# Altium PCB PCB1.PcbDoc (part 1 of 4)
Units mil, origin at the board's own origin, x right, y up, seen from the top; angles counter-clockwise.
Board outline 5048.23 x 6841.54 mil, 6 copper layers (Top Layer, Layer 1, Layer 2, Layer 3, Layer 4, Bottom Layer), stack 32.112 mil thick; 417 components, 339 nets, 2232 pads, 0 vias.
Unrouted connection lines stored in the file: 1169.
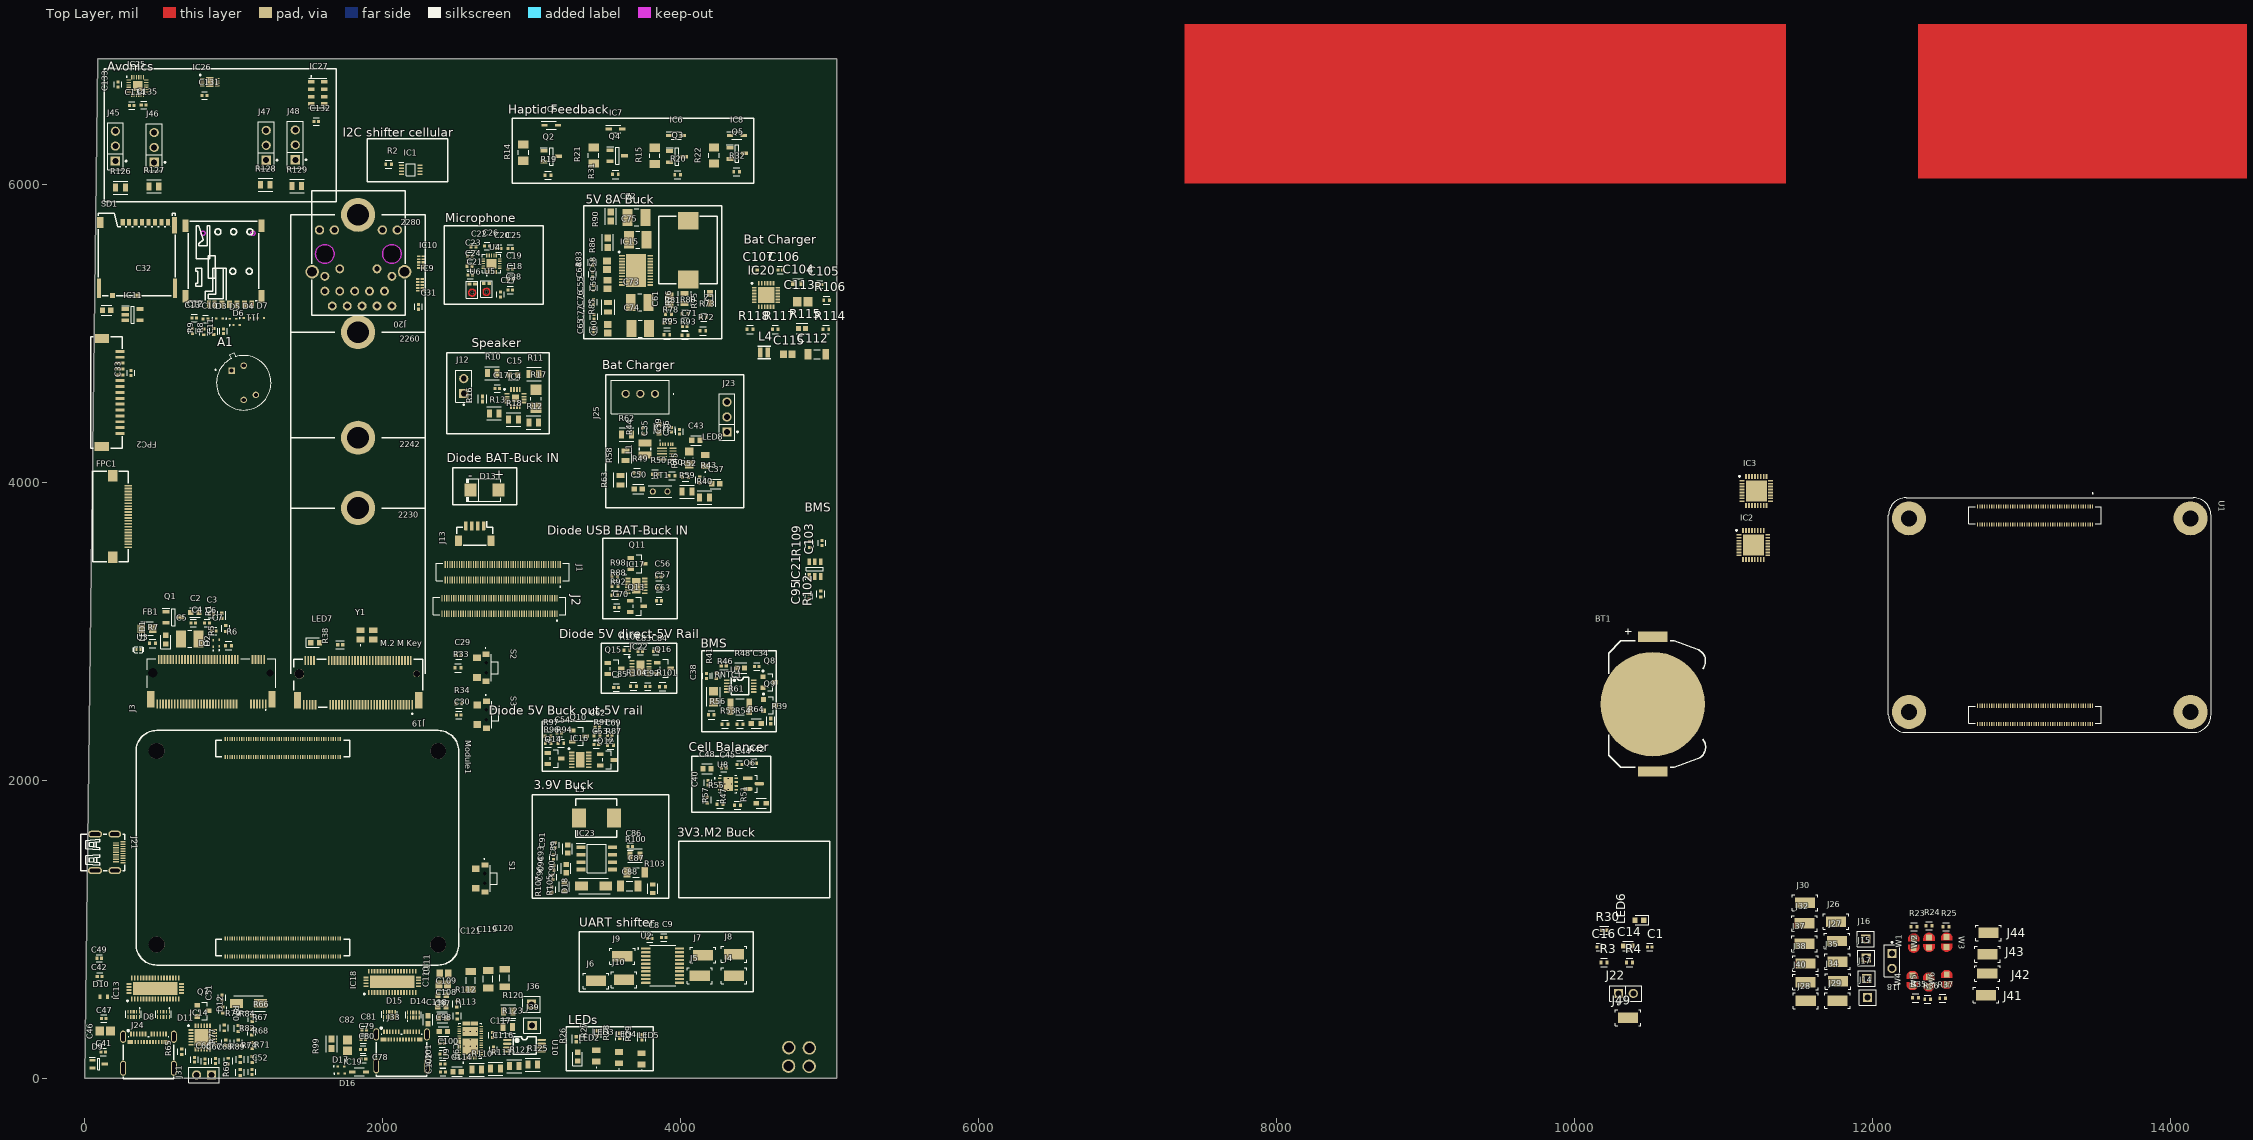
[diagram p0: Top Layer view]
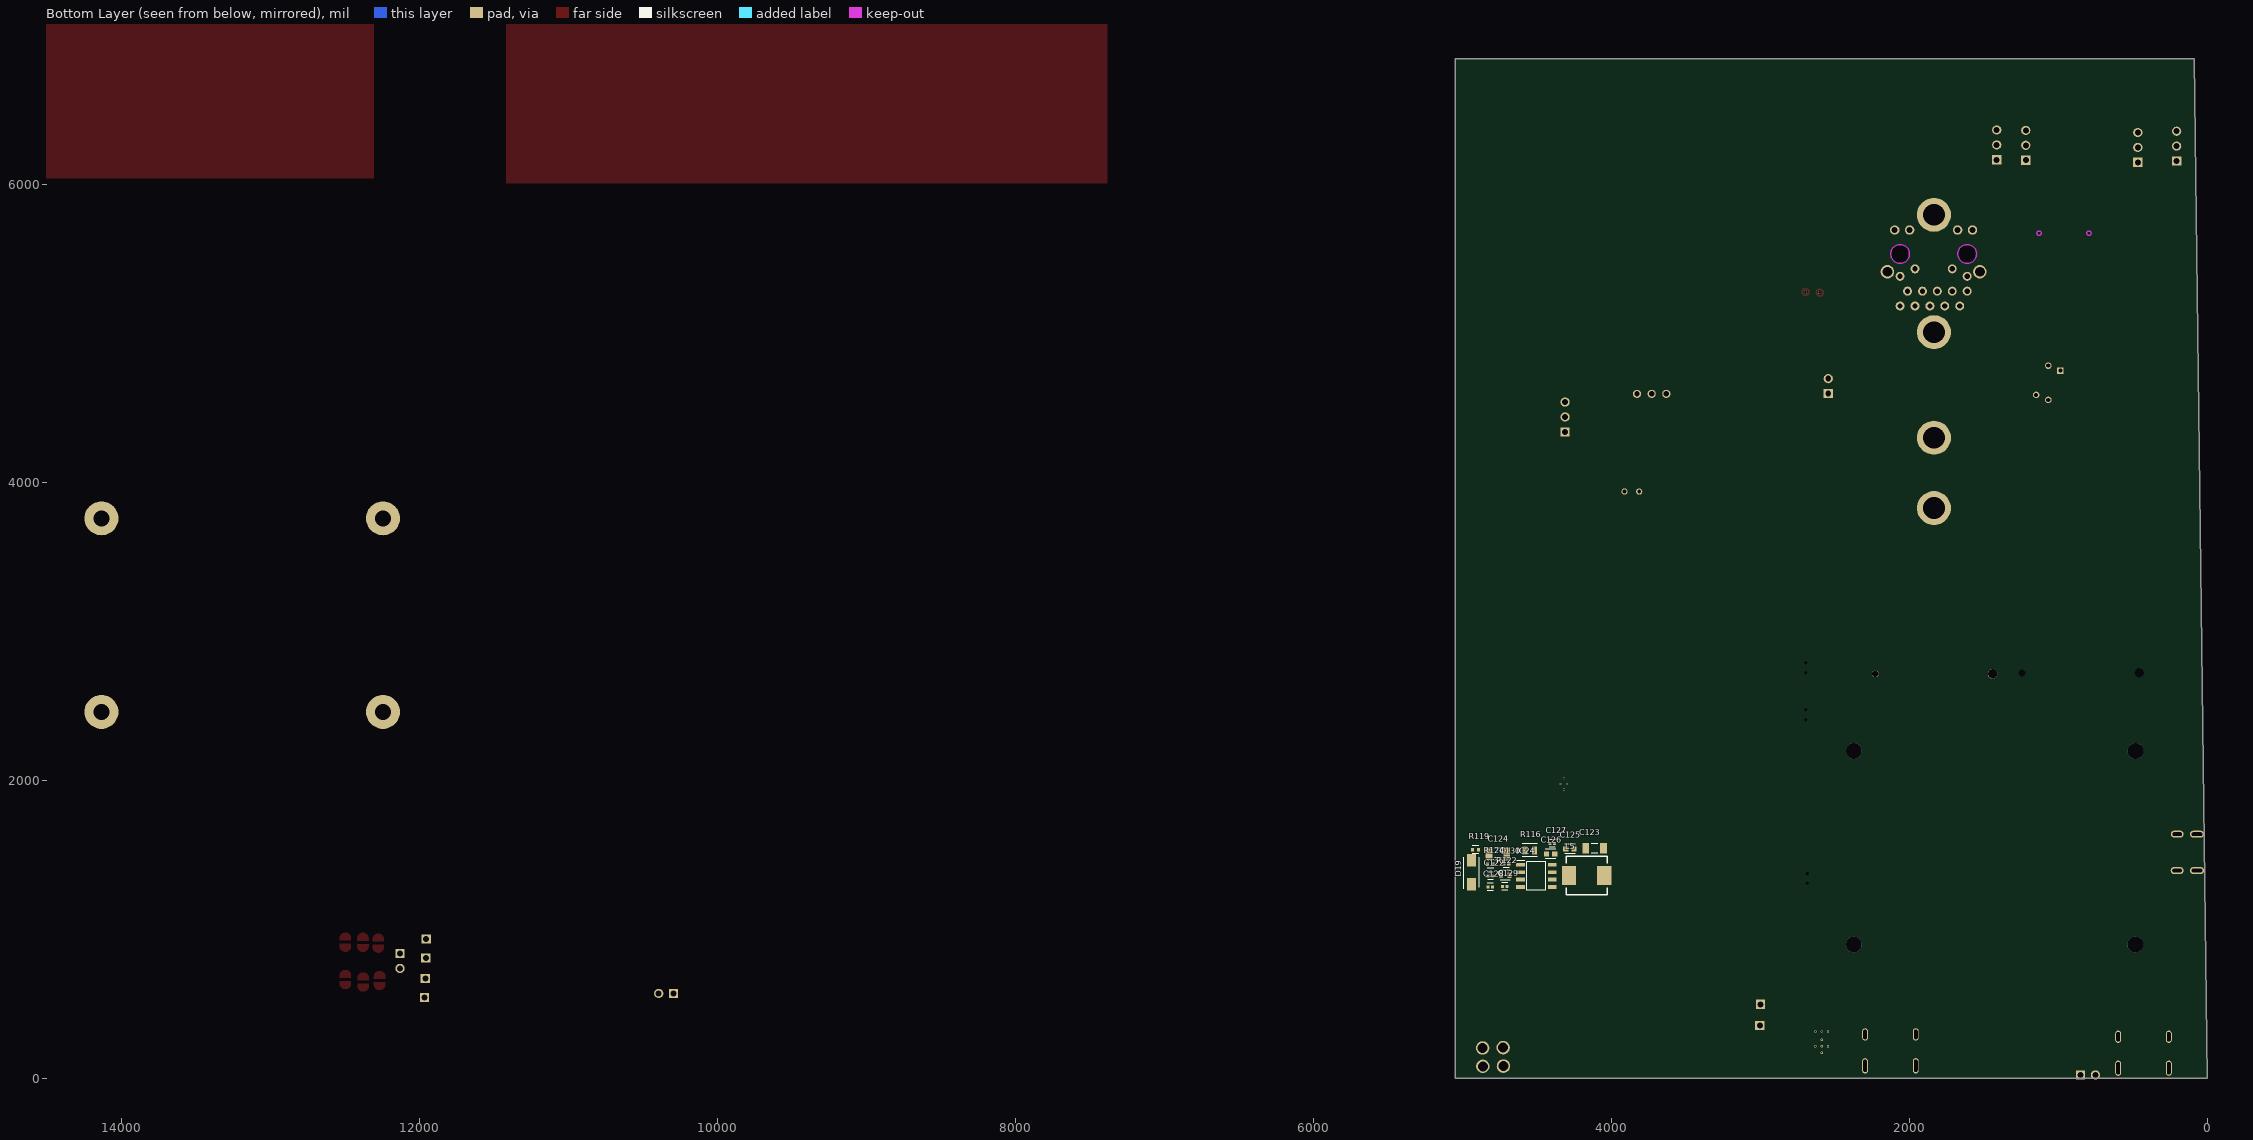
[diagram p1: Bottom Layer view, seen from below]

## Layer stack, top to bottom
Top Solder: solder mask 0.4, Solder Resist, Dk 3.5
Top Layer: signal copper 1.4
Dielectric 2: prepreg 2.8, PP-006, Dk 4.1
Layer 1: signal copper 1.378
Dielectric 3: prepreg 2.8, PP-006, Dk 4.1
Layer 2: signal copper 1.378
Dielectric 1: dielectric 12.6, FR-4, Dk 4.8
Layer 3: signal copper 1.378
Dielectric 4: prepreg 2.8, PP-006, Dk 4.1
Layer 4: signal copper 1.378
Dielectric 5: prepreg 2.8, PP-006, Dk 4.1
Bottom Layer: signal copper 1.4
Bottom Solder: solder mask 0.4, Solder Resist, Dk 3.5

## Board outline
0,0 5048.23,0 5048.23,6841.54 85.52,6841.54

## Design rules (kind name [scope] priority, off if disabled: settings)
Clearance Clearance2 [OnLayer('Power')] p1: gap=10 ignorepadtopadclearanceinfootprint=TRUE
Clearance Clearance_1 [All] p2: gap=4.5 ignorepadtopadclearanceinfootprint=TRUE
DiffPairsRouting [All] p1: maxlimit=5 minlimit=4.5 mostfreqgap=5 toplayer_prefgap=4.5 toplayer_minwidth=12.65 toplayer_maxwidth=14.97 toplayer_prefwidth=12.65 midlayer1_mingap=5 midlayer1_minwidth=15 midlayer1_maxwidth=15 midlayer1_prefwidth=15 midlayer2_mingap=5 midlayer2_minwidth=15 midlayer2_maxwidth=15 midlayer2_prefwidth=15 midlayer3_mingap=5 midlayer3_minwidth=15 midlayer3_maxwidth=15 midlayer3_prefwidth=15 midlayer4_mingap=5 midlayer4_minwidth=15 midlayer4_maxwidth=15 midlayer4_prefwidth=15 bottomlayer_prefgap=4.5 bottomlayer_minwidth=12.65 bottomlayer_maxwidth=14.97 bottomlayer_prefwidth=12.65 maxuncoupledlength=500
PolygonConnect [All] p1: connectstyle=Direct reliefconductorwidth=10 reliefentries=4 polygonreliefangle="90 Angle" airgapwidth=10
RoutingVias [All] p1: holewidth=12 width=24 viastyle="Through Hole" minholewidth=12 minwidth=18 maxholewidth=25 maxwidth=50
SolderMaskExpansion [All] p1: expansion=4 istentingtop=FALSE
SupplyNets "Schematic Supply Nets_23" [InNet('+3.9V_Filtered')] p1: voltage=0.000
SupplyNets "Schematic Supply Nets_16" [InNet('GND')] p2: voltage=0.000
SupplyNets "Schematic Supply Nets_22" [InNet('Buck_Input')] p3: voltage=0.000
SupplyNets "Schematic Supply Nets_21" [InNet('5V_Direct_PD_Out')] p4: voltage=0.000
SupplyNets "Schematic Supply Nets_20" [InNet('Buck_Out_5V')] p5: voltage=0.000
SupplyNets "Schematic Supply Nets" [InNet('VCC_USB_Bat_Sink')] p6: voltage=0.000
SupplyNets "Schematic Supply Nets_19" [InNet('USB_PD_3V3')] p7: voltage=0.000
SupplyNets "Schematic Supply Nets_18" [InNet('VCC_USB_Bat')] p8: voltage=0.000
SupplyNets "Schematic Supply Nets_10" [InNet('VCC_USB_Power')] p9: voltage=0.000
SupplyNets "Schematic Supply Nets_9" [InNet('+3V3_SD')] p10: voltage=0.000
SupplyNets "Schematic Supply Nets_8" [InNet('+3.9V')] p11: voltage=0.000
SupplyNets "Schematic Supply Nets_7" [InNet('+1.8V')] p12: voltage=0.000
SupplyNets "Schematic Supply Nets_4" [InNet('+5')] p13: voltage=0.000
SupplyNets "Schematic Supply Nets_2" [InNet('3V3_M2')] p14: voltage=0.000
SupplyNets "Schematic Supply Nets_15" [InNet('Midtap')] p15: voltage=0.000
SupplyNets "Schematic Supply Nets_13" [InNet('+3V3')] p16: voltage=0.000
SupplyNets "Schematic Supply Nets_5" [InNet('Bat+')] p17: voltage=0.000
SupplyNets "Schematic Supply Nets_3" [InNet('Bat-')] p18: voltage=0.000
Width [InNet('+3V3_RF')] p1: maxlimit=14.05 minlimit=10 preferedwidth=14.05 toplayer_minwidth=14.05 bottomlayer_minwidth=14.05 minimp=50.000000 maximp=50.000000 favimp=50.000000
Width Width_1 [InNet('NetC47_2')] p2: maxlimit=14.05 minlimit=10 preferedwidth=14.05 toplayer_minwidth=14.05 bottomlayer_minwidth=14.05 minimp=50.000000 maximp=50.000000 favimp=50.000000
Width Width2 [InNet('ANT_RF')] p3: maxlimit=50 minlimit=5 preferedwidth=15 toplayer_minwidth=14.05 toplayer_maxwidth=14.05 toplayer_prefwidth=14.05 bottomlayer_minwidth=14.05 bottomlayer_maxwidth=14.05 bottomlayer_prefwidth=14.05 minimp=50.000000 maximp=50.000000 favimp=50.000000 // NetC47_2
Width Widthall [All] p4: maxlimit=80 minlimit=4 preferedwidth=15 midlayer1_maxwidth=50 midlayer2_maxwidth=50 midlayer3_maxwidth=50 midlayer4_maxwidth=50 minimp=50.000000 maximp=50.000000 favimp=50.000000
29 further rules are at their usual default settings.

## Classes and differential pairs
component class "Flight - Avonics": C131 C132 C133 C134 C135 IC25 IC26 IC27 J41 J42 J43 J44 J45 J46 J47 J48 J49 R126 R127 R128 R129
component class Power: C34 C35 C36 C37 C38 C39 C40 C41 C42 C43 C44 C45 C46 C47 C48 C49 C50 C51 C52 C53 C54 C55 C56 C57 C58 C59 C60 C61 C62 C63 C64 C65 C66 C67 C68 C69 C70 C71 C72 C73 C74 C75 C76 C77 C78 C79 C80 C81 C82 C83 C84 C85 C86 C87 C88 C89 C90 C91 C92 C93 C94 C95 C96 C97 C98 C99 C100 C101 C102 C103 C104 C105 C106 C107 C108 C109 C110 C111 C112 C113 C114 C115 C116 C117 C118 C119 C120 C121 C122 C123 C124 C125 C126 C127 C128 C129 C130 D8 D9 D10 D11 D12 D13 D14 D15 D16 D17 D18 D19 IC12 IC13 IC14 IC15 IC16 IC17 IC18 IC19 IC20 IC21 IC22 IC23 IC24 J23 J24 J25 J26 J27 J28 J29 J30 J31 J32 J33 J34 J35 J36 J37 J38 J39 J40 L1 L2 L3 L4 L5 LED8 Q6 Q7 Q8 Q9 Q10 Q11 Q12 Q13 Q14 Q15 Q16 R39 R40 R41 R42 R43 R44 R45 R46 R47 R48 R49 R50 R51 R52 R53 R54 R55 R56 R57 R58 R59 R60 R61 R62 R63 R64 R65 R66 R67 R68 R69 R70 R71 R72 R73 R74 R75 R76 R77 R78 R79 R80 R81 R82 R83 R84 R85 R86 R87 R88 R89 R90 R91 R92 R93 R94 R95 R96 R97 R98 R99 R100 R101 R102 R103 R104 R105 R106 R107 R108 R109 R110 R111 R112 R113 R114 R115 R116 R117 R118 R119 R120 R121 R122 R123 R124 R125 RNTC1 RT1 U7 U8 U9 U10
component class Phone: A1 BT1 C1 C2 C3 C4 C5 C6 C7 C8 C9 C10 C11 C12 C13 C14 C15 C16 C17 C18 C19 C20 C21 C22 C23 C24 C25 C26 C27 C28 C29 C30 C31 C32 C33 D1 D2 D3 D4 D5 D6 D7 FB1 FPC1 FPC2 IC1 IC2 IC3 IC4 IC5 IC6 IC7 IC8 IC9 IC10 IC11 J1 J2 J3 J4 J5 J6 J7 J8 J9 J10 J11 J12 J13 J14 J15 J16 J17 J18 J19 J20 J21 J22 LED1 LED2 LED3 LED4 LED5 LED6 LED7 Module1 Q1 Q2 Q3 Q4 Q5 R1 R2 R3 R4 R5 R6 R7 R8 R9 R10 R11 R12 R13 R14 R15 R16 R17 R18 R19 R20 R21 R22 R23 R24 R25 R26 R27 R28 R29 R30 R31 R32 R33 R34 R35 R36 R37 R38 S1 S2 S3 SD1 SW? U1 U2 U3 U4 U5 U6 W1 W2 W3 W4 W5 W6 Y1

## Components (designator, comment, footprint, x,y, rotation, side; value= is the part's Value field where it differs from the comment)
A1 "MLX90640ESF-BAA-000-TU" TO292P930H600-4 1066.53,4667.73 r0 top
BT1 "3034TR RPI" "3034TR RPI" 10524,2511.17 r90 top
C1 "0402 330pF" FP-C0402-BB-MFG 10504.29,879.98 r0 top value="0.10 μF"
C2 "0603 10uF 25V" FP-CC0603-DC-MFG 738,3126 r0 top
C3 "0402 1uF 25V" FP-C0402-BB-MFG 849.25,3114 r0 top value="0.10 μF"
C4 "0402 330pF" FP-C0402-BB-MFG 727,3056 r0 top value="0.10 μF"
C5 "100uF 16V $0.34" FP-CC1210-GD-IPC_A 705,2949 r0 top
C6 "0402 0.1uF 50V" FP-C0402-BB-MFG 819.75,3054 r0 top value="0.10 μF"
C7 "0402 100pF 50V" FP-C0402-BB-MFG 864.75,3002 r0 top value="0.10 μF"
C8 "0402 0.1uF 50V" FP-C0402-BB-MFG 3792.28,937.24 r0 top value="0.10 μF"
C9 "0402 0.1uF 50V" FP-C0402-BB-MFG 3885.78,943.24 r0 top value="0.10 μF"
C10 "0402 0.1uF 50V" FP-C0402-BB-MFG 810,5097 r0 top value="0.10 μF"
C11 "0402 22pF 50V" FP-C0402-BB-MFG 932,5013 r90 top value="0.10 μF"
C12 "0402 22pF 50V" FP-C0402-BB-MFG 735,5102 r0 top value="0.10 μF"
C13 "0402 22pF 50V" FP-C0402-BB-MFG 723,5015 r90 top value="0.10 μF"
C14 "0603 10uF 25V" FP-CC0603-DC-MFG 10356.64,887.86 r0 top
C15 "0603 10uF 25V" FP-CC0603-DC-MFG 2878.23,4719.73 r0 top
C16 "0402 0.1uF 50V" FP-C0402-BB-MFG 10164.71,879.98 r0 top value="0.10 μF"
C17 "0402 0.1uF 50V" FP-C0402-BB-MFG 2768.23,4628.73 r0 top value="0.10 μF"
C18 "0402 0.1uF 50V" FP-C0402-BB-MFG 2856.72,5362.83 r0 top value="0.10 μF"
C19 "0402 0.1uF 50V" FP-C0402-BB-MFG 2854.72,5432.83 r0 top value="0.10 μF"
C20 "0402 1uF 25V" FP-C0402-BB-MFG 2777.46,5568.83 r0 top value="0.10 μF"
C21 "0402 1uF 25V" FP-C0402-BB-MFG 2586.72,5390.83 r0 top value="0.10 μF"
C22 "0402 1uF 25V" FP-C0402-BB-MFG 2608.72,5580.83 r0 top value="0.10 μF"
C23 "0402 1uF 25V" FP-C0402-BB-MFG 2583.72,5518.83 r0 top value="0.10 μF"
C24 "0402 1uF 25V" FP-C0402-BB-MFG 2581.72,5449.83 r0 top value="0.10 μF"
C25 "0402 0.1uF 50V" FP-C0402-BB-MFG 2854.72,5568.83 r0 top value="0.10 μF"
C26 "0402 0.1uF 50V" FP-C0402-BB-MFG 2699.72,5586.83 r0 top value="0.10 μF"
C27 "0402 1uF 25V" FP-C0402-BB-MFG 2788.72,5260.57 r90 top value="0.10 μF"
C28 "0402 1uF 25V" FP-C0402-BB-MFG 2855.72,5290.83 r0 top value="0.10 μF"
C29 "0402 0.1uF 50V" FP-C0402-BB-MFG 2510.25,2836 r0 top value="0.10 μF"
C30 "0402 0.1uF 50V" FP-C0402-BB-MFG 2509,2437 r0 top value="0.10 μF"
C31 "0402 0.1uF 50V" FP-C0402-BB-MFG 2239,5177 r90 top value="0.10 μF"
C32 "0603 10uF 25V" FP-CC0603-DC-MFG 146.56,5155 r0 top
C33 "0402 0.1uF 50V" FP-C0402-BB-MFG 310,4733.25 r90 top value="0.10 μF"
C34 "0402 0.1uF 50V" FP-C0402-BB-MFG 4510.43,2762.2 r0 top value="0.10 μF"
C35 "0603 10uF 25V" FP-CC0603-DC-MFG 3854.55,4360.36 r90 top
C36 "0402 0.1uF 50V" FP-C0402-BB-MFG 3990.55,4339.11 r90 top value="0.10 μF"
C37 "0603 0.33uF 25V" FP-CC0603-DC-MFG 4234.55,3989.36 r0 top
C38 "0402 10nF 50V" FP-C0402-BB-MFG 4173.43,2699.94 r90 top value="0.10 μF"
C39 "0402 1uF" FP-C0402-BB-MFG 3937.55,4352.11 r90 top value="0.10 μF"
C40 "0402 0.1uF 50V" FP-C0402-BB-MFG 4183.46,1983.12 r90 top value="0.10 μF"
C41 "0402 10nF 50V" FP-C0402-BB-MFG 123,175 r0 top value="0.10 μF"
C42 "0402 10nF 50V" FP-C0402-BB-MFG 99,683 r0 top value="0.10 μF"
C43 "0603 10uF 25V" FP-CC0603-DC-MFG 4100.99,4281.36 r0 top
C44 "0402 0.1uF 50V" FP-C0402-BB-MFG 4394.2,2105.12 r0 top value="0.10 μF"
C45 "0402 0.1uF 50V" FP-C0402-BB-MFG 4289.37,2082.68 r0 top value="0.10 μF"
C46 "4.7uF 0805" CAPC2013X145X50ML20T25 136,318 r180 top
C47 "0402 10nF 50V" FP-C0402-BB-MFG 127.75,401 r0 top value="0.10 μF"
C48 "0603 0.33uF 25V" FP-CC0603-DC-MFG 4176.02,2077.12 r0 top
C49 "0402 10nF 50V" FP-C0402-BB-MFG 97,805 r0 top value="0.10 μF"
C50 "0603 10uF 25V" FP-CC0603-DC-MFG 3714.55,3954.36 r0 top
C51 "0402 10nF 50V" FP-C0402-BB-MFG 921,541 r90 top value="0.10 μF"
C52 "0402 1uF" FP-C0402-BB-MFG 1122,41.75 r90 top value="0.10 μF"
C53 "0402 0.1uF 50V" FP-C0402-BB-MFG 3433.79,2240.8 r0 top value="0.10 μF"
C54 "0402 0.1uF 50V" FP-C0402-BB-MFG 3183.54,2316.8 r0 top value="0.10 μF"
C55 "0402 0.1uF 50V" FP-C0402-BB-MFG 3412.76,5303.71 r90 top value="0.10 μF"
C56 "0402 0.1uF 50V" FP-C0402-BB-MFG 3853.37,3363.61 r0 top value="0.10 μF"
C57 "0402 0.1uF 50V" FP-C0402-BB-MFG 3855.62,3290.61 r0 top value="0.10 μF"
C58 "22uF 0805 25V" CAPC2013X94X50LL20T25 3504.76,5455.96 r90 top
C59 "22uF 0805 25V" CAPC2013X94X50LL20T25 3507.76,5327.5 r90 top
C60 "22uF 0805 25V" CAPC2013X94X50LL20T25 3509.76,5030.5 r90 top
C61 "22uF 0805 25V" CAPC2013X94X50LL20T25 3923.76,5221.96 r90 top
C62 "0402 0.1uF 50V" FP-C0402-BB-MFG 3439.28,2356.8 r0 top value="0.10 μF"
C63 "0402 0.1uF 50V" FP-C0402-BB-MFG 3853.62,3204.61 r0 top value="0.10 μF"
C64 "0402 1uF 25V" FP-C0402-BB-MFG 3408.76,5396.71 r90 top value="0.10 μF"
C65 "0402 1uF 25V" FP-C0402-BB-MFG 3412.76,5023.96 r90 top value="0.10 μF"
C66 "0402 1uF" FP-C0402-BB-MFG 736,123 r90 top value="0.10 μF"
C67 "0402 1uF" FP-C0402-BB-MFG 808,114.25 r90 top value="0.10 μF"
C68 "0402 1uF" FP-C0402-BB-MFG 876,115 r90 top value="0.10 μF"
C69 "0402 0.1uF 50V" FP-C0402-BB-MFG 3523.28,2298.8 r0 top value="0.10 μF"
C70 "0402 0.1uF 50V" FP-C0402-BB-MFG 3570.87,3160.61 r0 top value="0.10 μF"
C71 "0402 1nF 50V" FP-C0402-BB-MFG 4026.5,5044.96 r0 top value="0.10 μF"
C72 "100uF 16V $0.34" FP-CC1210-GD-IPC_A 3702.76,5777.96 r0 top
C73 "100uF 16V $0.34" FP-CC1210-GD-IPC_A 3723.31,5206.91 r0 top
C74 "100uF 16V $0.34" FP-CC1210-GD-IPC_A 3726.76,5031.96 r0 top
C75 "100uF 16V $0.34" FP-CC1210-GD-IPC_A 3711.82,5627.96 r0 top
C76 "0402 0.1uF 50V" FP-C0402-BB-MFG 3413.76,5209.21 r90 top value="0.10 μF"
C77 "0402 1nF 50V" FP-C0402-BB-MFG 3417.76,5110.71 r90 top value="0.10 μF"
C78 "0402 10nF 50V" FP-C0402-BB-MFG 1869.75,130 r0 top value="0.10 μF"
C79 "0402 10nF 50V" FP-C0402-BB-MFG 1869,259 r0 top value="0.10 μF"
C80 "0402 10nF 50V" FP-C0402-BB-MFG 1866.75,193 r0 top value="0.10 μF"
C81 "0402 10nF 50V" FP-C0402-BB-MFG 1875,323 r0 top value="0.10 μF"
C82 "4.7uF 0805" CAPC2013X145X50ML20T25 1763,220 r90 top
C83 "0402 0.1uF 50V" FP-C0402-BB-MFG 3727.23,2865.63 r0 top value="0.10 μF"
C84 "0402 0.1uF 50V" FP-C0402-BB-MFG 3832.98,2865.63 r0 top value="0.10 μF"
C85 "0402 0.1uF 50V" FP-C0402-BB-MFG 3565.72,2623.63 r0 top value="0.10 μF"
C86 "0402 0.1uF 50V" FP-C0402-BB-MFG 3660.65,1555.91 r0 top value="0.10 μF"
C87 "47uF 1206 (25V)" CAPC1206(3216)190_N 3698.65,1381.91 r0 top value=47uF
C88 "47uF 1206 (25V)" CAPC1206(3216)190_N 3654.65,1289.91 r0 top value=47uF
C89 "0603 4.7uF 16V" FP-CC0603-DC-MFG 3240.65,1538.46 r90 top
C90 "0603 4.7uF 16V" FP-CC0603-DC-MFG 3230.65,1407.46 r90 top
C91 "0402 10nF 50V" FP-C0402-BB-MFG 3157.65,1565.65 r90 top value="0.10 μF"
C92 "0402 0.1uF 50V" FP-C0402-BB-MFG 3778.72,2629.63 r0 top value="0.10 μF"
C93 "0402 47pF 50V" FP-C0402-BB-MFG 3145.65,1482.91 r90 top value="0.10 μF"
C94 "0402 1nF 50V" FP-C0402-BB-MFG 3147.65,1411.65 r90 top value="0.10 μF"
C95 "0402 0.1uF 50V" FP-C0402-BB-MFG 4860.24,3233.27 r90 top value="0.10 μF"
C96 "0402 10nF 50V" FP-C0402-BB-MFG 3141.65,1348.16 r90 top value="0.10 μF"
C97 "0603 10uF 25V" FP-CC0603-DC-MFG 2401,403 r0 top
C98 "0603 10uF 25V" FP-CC0603-DC-MFG 2407,314 r0 top
C99 "0402 10nF 50V" FP-C0402-BB-MFG 2398,234 r0 top value="0.10 μF"
C100 "0402 10nF 50V" FP-C0402-BB-MFG 2400,161 r0 top value="0.10 μF"
C101 "0402 10nF 50V" FP-C0402-BB-MFG 2402,94 r180 top value="0.10 μF"
C102 "0402 10nF 50V" FP-C0402-BB-MFG 2404.25,41 r180 top value="0.10 μF"
C103 "0402 0.1uF 50V" FP-C0402-BB-MFG 4948.82,3592.52 r90 top value="0.10 μF"
C104 "0603 10uF 25V" FP-CC0603-DC-MFG 4785.84,5334.72 r0 top
C105 "0402 1uF 25V" FP-C0402-BB-MFG 4933.48,5326.85 r0 top value="0.10 μF"
C106 "0402 47nF 50V" FP-C0402-BB-MFG 4667.71,5426.26 r0 top value="0.10 μF"
C107 "0402 0.1uF 50V" FP-C0402-BB-MFG 4497.43,5426.26 r0 top value="0.10 μF"
C108 "0603 10uF 25V" FP-CC0603-DC-MFG 2397,480 r0 top
C109 "0603 10uF 25V" FP-CC0603-DC-MFG 2398.56,557 r0 top
C110 "22uF 0805" CAPC2013X94X50LL20T25 2405.46,628 r180 top
C111 "22uF 0805" CAPC2013X94X50LL20T25 2410,702 r180 top
C112 "47uF 16V 1206" CAPC1206(3216)100_N 4913.39,4859.25 r0 top value=100pF
C113 "4.7uF 50V 0805" CAPC2013X145X50ML20T25 4817.91,5211.61 r0 top
C114 "0603 10uF 25V" FP-CC0603-DC-MFG 2499,44 r0 top
C115 "22uF 25V 0805" CAPC2013X94X50LL20T25 4718.5,4859.25 r0 top
C116 "0402 330pF" FP-C0402-BB-MFG 2742,193 r90 top value="0.10 μF"
C117 "0402 330pF" FP-C0402-BB-MFG 2736.75,289.5 r90 top value="0.10 μF"
C118 "0603 10uF 25V" FP-CC0603-DC-MFG 2304,392.44 r90 top
C119 "47uF 16V 1206" CAPC1206(3216)100_N 2706.69,664.37 r90 top value=100pF
C120 "47uF 16V 1206" CAPC1206(3216)100_N 2817.91,672.24 r90 top value=100pF
C121 "47uF 16V 1206" CAPC1206(3216)100_N 2590.55,656.5 r90 top value=100pF
C122 "0402 0.1uF 50V" FP-C0402-BB-MFG 4809.98,1356.69 r180 bottom value="0.10 μF"
C123 "47uF 1206 (25V)" CAPC1206(3216)190_N 4111.72,1542.69 r180 bottom value=47uF
C124 "47uF 1206 (25V)" CAPC1206(3216)190_N 4760.72,1511.69 r180 bottom value=47uF
C125 "0603 4.7uF 16V" FP-CC0603-DC-MFG 4277.72,1538.69 r180 bottom
C126 "0603 4.7uF 16V" FP-CC0603-DC-MFG 4406.17,1504.69 r180 bottom
C127 "0402 10nF 50V" FP-C0402-BB-MFG 4395.47,1576.69 r180 bottom value="0.10 μF"
C128 "0402 1nF 50V" FP-C0402-BB-MFG 4812.72,1284.69 r180 bottom value="0.10 μF"
C129 "0402 47pF 50V" FP-C0402-BB-MFG 4714.72,1286.69 r180 bottom value="0.10 μF"
C130 "0402 10nF 50V" FP-C0402-BB-MFG 4703.72,1436.69 r180 bottom value="0.10 μF"
C131 "0402 0.1uF 50V" FP-C0402-BB-MFG 802.74,6596.79 r0 top value="0.10 μF"
C132 "0402 0.1uF 50V" FP-C0402-BB-MFG 1553.99,6422.79 r0 top value="0.10 μF"
C133 "0402 0.1uF 50V" FP-C0402-BB-MFG 222.74,6669.79 r90 top value="0.10 μF"
C134 "0402 10nF 50V" FP-C0402-BB-MFG 313.99,6529.79 r0 top value="0.10 μF"
C135 "0402 0.1uF 50V" FP-C0402-BB-MFG 394.49,6531.79 r0 top value="0.10 μF"
D1 "5V VRWM, 2.5pF" SODFL1060X40N 862.2,2918.31 r90 top
D2 "5V VRWM, 2.5pF" SODFL1060X40N 901.57,2920.28 r90 top
D3 "5V VRWM, 2.5pF" SODFL1060X40N 903,5100 r0 top
D4 "5V VRWM, 2.5pF" SODFL1060X40N 1087,5102 r0 top
D5 "5V VRWM, 2.5pF" SODFL1060X40N 995.65,5098 r0 top
D6 "5V VRWM, 2.5pF" SODFL1060X40N 1019.35,5055 r0 top
D7 "5V VRWM, 2.5pF" SODFL1060X40N 1181,5103 r0 top
D8 "ESD73034D-10/TR" DFN2510-10_L2.5-W1.0-P0.50-BL 328,429 r180 top
D9 "ESDA25W" SOT65P210X110-3N 92,95 r0 top
D10 "ESDA25P35-1U1M" ESDA25P351U1M 127,546 r0 top
D11 "ESD73034D-10/TR" DFN2510-10_L2.5-W1.0-P0.50-BL 528,429 r180 top
D12 "SS34A" DIOM5026X262N 1098.71,501 r180 top
D13 "SS54" SMB_L4.6-W3.6-LS5.3-RD 2682.69,3947.98 r0 top
D14 "ESD73034D-10/TR" DFN2510-10_L2.5-W1.0-P0.50-BL 2205,425 r0 top
D15 "ESD73034D-10/TR" DFN2510-10_L2.5-W1.0-P0.50-BL 2043.68,428.04 r0 top
D16 "5V VRWM, 2.5pF" SODFL1060X40N 1722,31 r0 top
D17 "5V VRWM, 2.5pF" SODFL1060X40N 1719,79 r0 top
D18 "SS34A" DIOM5026X262N 3415.65,1290.91 r180 top
D19 "SS34A" DIOM5026X262N 4936.72,1382.39 r90 bottom
FB1 "HZ0805B272R-10" FP-HZ0805B272R-10-MFG 417,3018 r0 top
FPC1 "AFC01-S22FCA-00" FPC-SMD_P0.5-22P_FGS-XJ-H2.0 239.72,3770.62 r90 top
FPC2 "HC-FPC-1.0-15P-FHH20" FPC-SMD_15P-P0.50_HC-FPC-1.0-15P-FHH20 175,4603 r270 top
IC1 "PCA9306DCUR" SOP50P310X90-8N 2187.23,6097.63 r0 top
IC2 "ST25R3916B-AQWT" QFN50P500X500X100-33N-D 11199.53,3578.54 r0 top
IC3 "(Cheaper by $1.4) TRF7964ARHBR" QFN50P500X500X100-33N-D 11219.46,3941.53 r0 top
IC4 "MAX98357AETE+T" QFN50P300X300X80-17N 2890.23,4564.73 r0 top
IC5 "20V 500mA Tiny Schottky, 5.5A surge" SOD2513X120N 3130.57,6396.22 r0 top
IC6 "20V 500mA Tiny Schottky, 5.5A surge" SOD2513X120N 3968.23,6328.16 r0 top
IC7 "20V 500mA Tiny Schottky, 5.5A surge" SOD2513X120N 3562.22,6372.31 r0 top
IC8 "20V 500mA Tiny Schottky, 5.5A surge" SOD2513X120N 4376.48,6328.25 r0 top
IC9 "TPD4EUSB30DQAR" DQA(R-PUSON-N10) 2249.84,5324.37 r90 top
IC10 "TPD4EUSB30DQAR" DQA(R-PUSON-N10) 2256.84,5477 r90 top
IC11 "RT9742GGJ5" SOT94P280X100-5N 321,5125 r0 top
IC12 "Battery Charger" SY6982CQDC 3905.55,4200.36 r0 top
IC13 "HD3SS6126RUAR" QFN50P350X900X80-43N-D 473,602 r90 top
IC14 "USB-PD" QFN50P400X400X100-25N-D 791.16,273.74 r0 top
IC15 "TPS53318DQPR" SON50P500X600X150-23N 3699.76,5421.96 r0 top
IC16 "LM74810QDRRRQ1" SON50P300X300X80-13N-D 3324.67,2136.75 r0 top
IC17 "LM74810QDRRRQ1" SON50P300X300X80-13N-D 3700.62,3304.61 r0 top
IC18 "HD3SS6126RUAR" QFN50P350X900X80-43N-D 2063,647 r90 top
IC19 "20V 500mA Tiny Schottky, 5.5A surge" SOD2513X120N 1841,43 r0 top
IC20 "BQ25886RGER" QFN50P400X400X100-25N-D 4572.83,5256.89 r0 top
IC21 "HY2120-CB" SOT95P280X140-6N 4900.59,3417.32 r90 top
IC22 "LM74810QDRRRQ1" SON50P300X300X80-13N-D 3728.98,2752.63 r0 top
IC23 "Buck converter" SOIC127P600X175-8N 3435.87,1474.91 r0 top
IC24 "Buck converter" SOIC127P600X175-8N 4502.72,1357.69 r180 bottom
IC25 "IMU" QFN40P300X300X95-25N-D 354.36,6659.73 r0 top
IC26 "Magnetometer" SON40P250X200X40-9N-D 838.53,6685.66 r0 top
IC27 "Barometric Pressure Sensor" MS5607-02BA03 1563.05,6613.39 r0 top
J1 "CM5 connector: 10164227-1001A1RLF" "Correct AMPHENOL_10164227-1001A1RLF" 2805.12,3396.46 r0 top
J2 "CM5 connector: 10164227-1001A1RLF" "Correct AMPHENOL_10164227-1001A1RLF" 2783.46,3169.49 r0 top
J3 "2199230-3" 21992303 849.83,2720.43 r180 top
J4 "Debug_RX" FP-5015-MFG 4356.53,687.24 r0 top
J5 "UART_TX" FP-5015-MFG 4127.53,687.24 r0 top
J6 "Debug_CTS" FP-5015-MFG 3430.53,653.24 r0 top
J7 "Debug_DTR" FP-5015-MFG 4149.53,826.24 r0 top
J8 "Debug_RTS" FP-5015-MFG 4357.53,832.24 r0 top
J9 "SIM_GPIO77" FP-5015-MFG 3607.53,819.24 r0 top
J10 "SIM_GPIO3" FP-5015-MFG 3619.53,660.24 r0 top
J11 "SIM" PCBComponent_1 963,5506 r180 top
J12 "Audio Out" FP-TSW-102-07-F-S-MFG 2543.31,4645.47 r90 top
J13 "JST_SHBM04B-SRSS-TB" JST_SHBM04B-SRSS-TB 2617.13,3655.51 r180 top
J14 "GPIO5" FP-TSW-101-07-L-S-MFG 11966,541 r0 top
J15 "GPIO12" FP-TSW-101-07-L-S-MFG 11957,806 r0 top
J16 "GPIO13" FP-TSW-101-07-L-S-MFG 11954,934 r0 top
J17 "GPIO6" FP-TSW-101-07-L-S-MFG 11960,669 r0 top
J18 "GPIO" FP-TSW-102-07-F-S-MFG 12130,787 r270 top
J19 "M.2 M Key connector" "M.2 M Key connector RPI" 1833.8,2714.43 r180 top
J20 "LPJG0926HENL" RJ45-TH_LPJG0926HENL_C22457393 1836.02,5438 r180 top
J21 "HYC23-HDMID19-650" AUDIO-TH_HYC23-HDMID19-650 162.22,1516 r270 top
J22 "TSW-102-14-G-S" FP-TSW-102-14-G-S-MFG 10343.5,568.9 r0 top
J23 "Bat" FP-TSW-103-14-G-S-MFG 4309.55,4438.36 r90 top
J24 "1054500101" USB-C-SMD_TYPE-C-USB-18 427.16,181.59 r0 top
J25 "JST-XH 2.5mm 3P" B3BXHALFSN 3826.98,4593.36 r180 top
J26 "GPIO" FP-5015-MFG 11753,1051 r0 top
J27 "PDO3" FP-5015-MFG 11762,921 r0 top
J28 "Alert_USB_Bat" FP-5015-MFG 11551,520 r0 top
J29 "PDO2" FP-5015-MFG 11764,521 r0 top
J30 "Attach" FP-5015-MFG 11547,1177 r0 top
J31 "TSW-102-12-T-S" FP-TSW-102-12-T-S-MFG 800,22 r180 top
J32 "Reset_USB_Bat_PD" FP-5015-MFG 11542,1039 r0 top
J33 "1054500101" USB-C-SMD_TYPE-C-USB-18 2125.92,197.57 r0 top
J34 "USB_Power_GPIO0" FP-5015-MFG 11767,650 r0 top
J35 "USB_Power_GPIO1" FP-5015-MFG 11764,783 r0 top
J36 "SCL_USB_Power" FP-TSW-101-07-L-S-MFG 2998,496 r0 top
J37 "USB_Power_GPIO2" FP-5015-MFG 11543,902 r0 top
J38 "USB_Power_GPIO4" FP-5015-MFG 11549,770 r0 top
J39 "SDA_USB_Power" FP-TSW-101-07-L-S-MFG 3003,354 r0 top
J40 "USB_Power_GPIO5" FP-5015-MFG 11549,645 r0 top
J41 "SCLK" FP-5015-MFG 12760.83,558.07 r0 top
J42 "SDI" FP-5015-MFG 12769.68,702.76 r0 top
J43 "SDO" FP-5015-MFG 12771.65,831.69 r0 top
J44 "CS_Barometer" FP-5015-MFG 12778.54,975.39 r0 top
J45 "Alerion1" FP-TSW-103-14-G-S-MFG 204.72,6256.3 r90 top
J46 "Alerion2" FP-TSW-103-14-G-S-MFG 465.55,6247.44 r90 top
J47 "Alerion3" FP-TSW-103-14-G-S-MFG 1217.52,6261.81 r90 top
J48 "Alerion4" FP-TSW-103-14-G-S-MFG 1412.4,6264.76 r90 top
J49 "CS_New_Sensor" FP-5015-MFG 10359.25,405.51 r0 top
L1 "0.68uH" IND-SMD_L2.5-W2.0 3759.84,4223.43 r90 top value=680nH
L2 "4.7uH 9A" IND-SMD_L11.5-W10.0_FXL1040 4048.76,5557.96 r270 top value=4.7uH
L3 "6.8uH" IND-SMD_L7.0-W6.6 3433.65,1745.91 r0 top
L4 "1uH" IND-SMD_L2.0-W1.6_MTQH201610S 4559.06,4871.06 r0 top
L5 "6.8uH" IND-SMD_L7.0-W6.6 4164.73,1360.69 r180 bottom
LED1 "White 0603" LEDC1608X70N 543,2943.53 r90 top
LED2 "Yellow 0603" LEDC1608X70N 3307.36,144.88 r90 top
LED3 "White 0805" KT0805G 3433.36,149.76 r0 top
LED4 "Red 0805" KT0805G 3585.36,137.95 r0 top
LED5 "Green 0805" KT0805G 3737.36,129.95 r0 top
LED6 "Red 0603" LEDC1608X70N 10435.04,1061.02 r180 top
LED7 "Red 0603" LEDC1608X70N 1545.47,2924 r0 top
LED8 "Yellow 0805" KT0805G 4164.55,4145.36 r0 top
Module1 "ComputeModule5 CM5" ComputeModule5-CM5 481.93,2196.27 r270 top
Q1 "VDS 30V, Max 5.7A, PD 1.4W. NMOS" SOT95P280X125-3N 594,3094 r0 top
Q2 "VDS 30V, Max 5.7A, PD 1.4W. N-FET" SOT95P280X125-3N 3130.78,6187.62 r0 top
Q3 "VDS 30V, Max 5.7A, PD 1.4W. N-FET" SOT95P280X125-3N 3974.23,6186.16 r0 top
Q4 "VDS 30V, Max 5.7A, PD 1.4W. N-FET" SOT95P280X125-3N 3574.43,6191.71 r0 top
Q5 "VDS 30V, Max 5.7A, PD 1.4W. N-FET" SOT95P280X125-3N 4378.27,6207.25 r0 top
Q6 "MMBT3904-7-F" FP-SOT23-IPC_A 4488.91,1977.14 r0 top
Q7 "PMOS 30V 8A SOT-23-3" FP-SOT23-MFG 793,452 r0 top
Q8 "Discharge Protection" ONSC-SOT-23-3-318-08_V 4591.43,2658.2 r0 top
Q9 "Charge Protection" ONSC-SOT-23-3-318-08_V 4594.43,2504.2 r0 top
Q10 "NMOS 30V 9A 10mΩ SOT-23-3" FP-C04-17458-MFG 3318.26,2295.8 r0 top
Q11 "NMOS 30V 9A 10mΩ SOT-23-3" FP-C04-17458-MFG 3709.62,3453.61 r0 top
Q12 "NMOS 30V 9A 10mΩ SOT-23-3" FP-C04-17458-MFG 3504.54,2136.8 r0 top
Q13 "NMOS 30V 9A 10mΩ SOT-23-3" FP-C04-17458-MFG 3707.62,3167.61 r0 top
Q14 "NMOS 30V 9A 10mΩ" FP-C04-17458-MFG 3151.26,2145.8 r0 top
Q15 "NMOS 30V 9A 10mΩ SOT-23-3" FP-C04-17458-MFG 3554.98,2749.63 r0 top
Q16 "NMOS 30V 9A 10mΩ SOT-23-3" FP-C04-17458-MFG 3888.7,2751.63 r0 top
R1 "680 0402" FP-AF0402-IPC_B 918,3104.87 r90 top
R2 "200k 0402" FP-RMCF0402-MFG 2039.23,6134.63 r0 top
R3 "2.2k 0402" FP-RMCF0402-MFG 10197.21,776.64 r0 top
R4 "2.2k 0402" FP-RMCF0402-MFG 10367.49,776.64 r0 top
R5 "10k 0402" FP-RMCF0402-MFG 946,3018.68 r90 top
R6 "100k 0402" FP-RMCF0402-MFG 964,2904 r0 top
R7 "100Ohms 0402" FP-RMCF0402-MFG 453.68,2918 r0 top
R8 "22Ohms 0402" FP-RMCF0402-MFG 865,5012.69 r90 top
R9 "22Ohms 0402" FP-RMCF0402-MFG 798,5010 r90 top
R10 "0ohm 0805" FP-RN73R2A-IPC_C 2733.73,4732.73 r0 top
R11 "DNP" FP-RN73R2A-IPC_C 3014.23,4726.73 r0 top
R12 "0ohm 0805" FP-RN73R2A-IPC_C 3012.23,4401.73 r0 top
R13 "DNP" FP-RN73R2A-IPC_C 2747.23,4462.73 r0 top
R14 "1206 Haptic Feedback Place Holder (FIT0774)" FP-RMCF1206-IPC_B 2943.57,6212.38 r90 top
R15 "1206 Haptic Feedback Place Holder (FIT0774)" FP-RMCF1206-IPC_B 3825.23,6191.32 r90 top
R16 "680k 0402" FP-AF0402-IPC_B 2669.29,4559.06 r90 top
R17 "0ohm 1206" FP-HCJ1206-MFG 3028.23,4560.73 r90 top
R18 "100k 0805" FP-RN73R2A-IPC_C 2877.23,4421.73 r0 top
R19 "100Ohms 0402" FP-RMCF0402-MFG 3107.88,6061.22 r0 top
R20 "100Ohms 0402" FP-RMCF0402-MFG 3979.23,6064.16 r0 top
R21 "1206 Haptic Feedback Place Holder (FIT0774)" FP-RMCF1206-IPC_B 3415.22,6193.31 r90 top
R22 "1206 Haptic Feedback Place Holder (FIT0774)" FP-RMCF1206-IPC_B 4222.48,6193.25 r90 top
R23 "4.7k 0402" FP-RMCF0402-MFG 12277.32,1016.75 r0 top
R24 "4.7k 0402" FP-RMCF0402-MFG 12378.32,1023.75 r0 top
R25 "4.7k 0402" FP-RMCF0402-MFG 12493,1016.75 r0 top
R26 "2.2k 0402" FP-AF0402-IPC_B 3298.36,262.23 r90 top
R27 "2.2k 0402" FP-AF0402-IPC_B 3438.36,301.36 r90 top
R28 "18k 0402" FP-AF0402-IPC_B 3591.36,284.36 r90 top
R29 "2.2k 0402" FP-AF0402-IPC_B 3739.36,275.36 r90 top
R30 "1.5k 0402" FP-AF0402-IPC_B 10198.96,992.13 r0 top
R31 "100Ohms 0402" FP-RMCF0402-MFG 3560.54,6066.31 r180 top
R32 "100Ohms 0402" FP-RMCF0402-MFG 4375.17,6084.25 r0 top
R33 "10k 0402" FP-RMCF0402-MFG 2505.32,2754 r0 top
R34 "10k 0402" FP-RMCF0402-MFG 2510,2512 r0 top
R35 "4.7k 0402" FP-RMCF0402-MFG 12287,538.75 r0 top
R36 "4.7k 0402" FP-RMCF0402-MFG 12369.32,529.75 r0 top
R37 "4.7k 0402" FP-RMCF0402-MFG 12470.32,535.75 r0 top
R38 "1.5k 0402" FP-AF0402-IPC_B 1713.87,2910 r180 top
R39 "1k 0402" FP-AF0402-IPC_B 4603.43,2397.2 r90 top
R40 "DNP" FP-RN73R2A-IPC_C 4159.55,3898.36 r0 top
R41 "1k 0402" FP-AF0402-IPC_B 4289.55,2768.2 r180 top
R42 "100Ohms 0402" FP-RMCF0402-MFG 4489.77,2115.12 r0 top
R43 "4.7k 0402" FP-RMCF0402-MFG 4128.55,4016.05 r90 top
R44 "10k 0402" FP-RMCF0402-MFG 3744.55,4345.05 r90 top
R45 "0ohm 0805" FP-HCJ0805-MFG 4055.55,4162.67 r90 top
R46 "200k 0402" FP-RMCF0402-MFG 4238.43,2701.2 r90 top
R47 "470K 0402" FP-RMCF0402-MFG 4381.14,1832.12 r180 top
R48 "110K 0603" FP-RMCF0603-IPC_C 4403.43,2753.2 r0 top
R49 "10k 0402" FP-RMCF0402-MFG 3706.55,4065.36 r0 top
R50 "10k 0402" FP-RMCF0402-MFG 3828.24,4055.36 r0 top
R51 "270 0603" FP-AC0603-MFG 4540.92,1845.12 r180 top
R52 "150k 0402" FP-RMCF0402-MFG 4032.24,4034.36 r0 top
R53 "10k 0402" FP-RMCF0402-MFG 4297.43,2375.2 r0 top
R54 "10k 0402" FP-RMCF0402-MFG 4397.43,2376.2 r0 top
R55 "150 0402" FP-RMCF0402-MFG 4178.46,1867.12 r90 top
R56 "2k 0402" FP-RMCF0402-MFG 4204.74,2438.2 r0 top
R57 "120 0402" FP-RMCF0402-MFG 4262.46,1839.12 r180 top
R58 "0ohm 0805" FP-RN73R2A-IPC_C 3627.55,4177.36 r90 top
R59 "5k 0805" FP-RN73R2A-IPC_C 4042.05,3937.36 r0 top
R60 "47k 0402" FP-RMCF0402-MFG 3941.55,4043.36 r0 top
R61 "0.015Ohm 1210" FP-RMCF1210-MFG 4396.43,2492.2 r0 top
R62 "DNP" FP-RN73R2A-IPC_C 3636.05,4320.36 r0 top
R63 "10k 0805" FP-RN73R2A-IPC_C 3594.55,4014.36 r90 top
R64 "3MOhms 0603" FP-AC0603-MFG 4506.96,2380.2 r0 top
R65 "100k 0402" FP-RMCF0402-MFG 650,177.68 r90 top
R66 "470 0402" FP-RMCF0402-MFG 1124,399 r90 top
R67 "10k 0402" FP-RMCF0402-MFG 1120,310 r90 top
R68 "10k 0402" FP-RMCF0402-MFG 1123,219.32 r90 top
R69 "100Ohms 0402" FP-RMCF0402-MFG 1042,37.32 r90 top
R70 "22k 0402" FP-RMCF0402-MFG 925,457 r270 top
R71 "1k 0402" FP-RMCF0402-MFG 1124,125.32 r90 top
R72 "22k 0402" FP-RMCF0402-MFG 4147.76,5015.96 r0 top
R73 "100k 0402" FP-RMCF0402-MFG 4154.07,5106.96 r0 top
R74 "10k 0402" FP-RMCF0402-MFG 1044,125 r90 top
R75 "3K 0603" FP-RMCF0603-IPC_A 4196.76,5234.96 r90 top
R76 "DNP" FP-RN73R2A-IPC_C 4025.76,5233.46 r90 top
R77 "10k 0402" FP-RMCF0402-MFG 947,238 r90 top
R78 "100k 0402" FP-RMCF0402-MFG 3908.44,5065.96 r0 top
R79 "10k 0402" FP-RMCF0402-MFG 936,338 r90 top
R80 "24k 0402" FP-RMCF0402-MFG 4028.44,5131.96 r0 top
R81 "200k 0402" FP-RMCF0402-MFG 3916.76,5128.96 r0 top
R82 "4.7k 0402" FP-RMCF0402-MFG 1030,237.32 r90 top
R83 "22k 0402" FP-RMCF0402-MFG 3405.76,5473.65 r90 top
R84 "4.7k 0402" FP-RMCF0402-MFG 1030,334 r90 top
R85 "0ohm 0805" FP-RN73R2A-IPC_C 3512.76,5174.46 r90 top
R86 "3K 0603" FP-RMCF0603-IPC_A 3509.76,5607.96 r90 top
R87 "100k 0402" FP-RMCF0402-MFG 3528.22,2235.8 r0 top
R88 "100k 0402" FP-RMCF0402-MFG 3558.94,3302.61 r0 top
R89 "100k 0402" FP-RMCF0402-MFG 964,114 r90 top
R90 "2.2Ohm 0603" FP-RMCF0603-IPC_A 3529.76,5783.96 r90 top
R91 "4.7k 0402" FP-RMCF0402-MFG 3438.54,2297.8 r0 top
R92 "4.7k 0402" FP-RMCF0402-MFG 3557.31,3241.61 r0 top
R93 "100k 0402" FP-RMCF0402-MFG 4027.76,4985.96 r0 top
R94 "100k 0402" FP-RMCF0402-MFG 3194.85,2248.8 r0 top
R95 "2k 0402" FP-RMCF0402-MFG 3906.44,4988.96 r0 top
R96 "5.6k 0402" FP-RMCF0402-MFG 3110.22,2247.8 r0 top
R97 "100k 0402" FP-RMCF0402-MFG 3108.54,2296.8 r0 top
R98 "5.6k 0402" FP-RMCF0402-MFG 3556.62,3368.61 r0 top
R99 "3.48Ohms 0603" FP-RMCF0603-IPC_A 1656,231 r90 top
R100 "0ohm 0805" FP-RN73R2A-IPC_C 3693.15,1494.91 r0 top
R101 "100k 0402" FP-RMCF0402-MFG 3877.98,2628.63 r0 top
R102 "2k 0402" FP-RMCF0402-MFG 4938.98,3250.98 r90 top
R103 "13k 0603" FP-RMCF0603-MFG 3811.65,1271.91 r90 top
R104 "4.7k 0402" FP-RMCF0402-MFG 3682.66,2630.63 r0 top
R105 "30k 0603" FP-RMCF0603-MFG 3217.65,1284.91 r90 top
R106 "2.2k 0402" FP-RMCF0402-MFG 4979.33,5221.46 r0 top
R107 "3.3k 0402" FP-RMCF0402-MFG 3134.65,1264.91 r90 top
R108 "5.6k 0402" FP-RMCF0402-MFG 3637.98,2872.63 r0 top
R109 "330 0402" FP-RMCF0402-MFG 4866.14,3582.68 r90 top
R110 "0ohm 0805" FP-RN73R2A-IPC_C 2630,57 r0 top
R111 "0ohm 0805" FP-RN73R2A-IPC_C 2756,64 r0 top
R112 "4.7k 0402" FP-RMCF0402-MFG 2496,497 r90 top
R113 "4.7k 0402" FP-RMCF0402-MFG 2499,416.32 r90 top
R114 "10k 0402" FP-RMCF0402-MFG 4973.75,5025.67 r0 top
R115 "390 0603" FP-RMCF0603-IPC_C 4814.29,5032.56 r0 top
R116 "0ohm 0805" FP-RN73R2A-IPC_C 4547.23,1529.69 r180 bottom
R117 "8.2k 0402" FP-RMCF0402-MFG 4634.17,5025.67 r0 top
R118 "3.9k 0402" FP-RMCF0402-MFG 4463.88,5025.67 r0 top
R119 "10k 0402" FP-RMCF0402-MFG 4910.72,1533.69 r180 bottom
R120 "0ohm 0805" FP-RN73R2A-IPC_C 2841.5,448 r0 top
R121 "DNP" FP-RN73R2A-IPC_C 2882,81 r0 top
R122 "30k 0603" FP-RMCF0603-MFG 4712.18,1362.69 r180 bottom
R123 "DNP" FP-RN73R2A-IPC_C 2839.5,345 r0 top
R124 "3.3k 0402" FP-RMCF0402-MFG 4809.72,1437.69 r180 bottom
R125 "DNP" FP-RN73R2A-IPC_C 3006,91 r0 top
R126 "0ohm 0805" FP-RN73R2A-IPC_C 239.19,5977.36 r0 top
R127 "0ohm 0805" FP-RN73R2A-IPC_C 463.56,5986.22 r0 top
R128 "0ohm 0805" FP-RN73R2A-IPC_C 1211.63,5997.05 r0 top
R129 "0ohm 0805" FP-RN73R2A-IPC_C 1423.23,5988.19 r0 top
RNTC1 "100KOHM 0805" FP-NCP21-0_2-IPC_A 4219.43,2560.64 r90 top
RT1 "NXRT15XH103FA1B030" THERM_NXRT15XH103FA1B030 3861.55,3937.36 r0 top
S1 "TS24CA" TS24CA 2685,1340.46 r270 top
S2 "TS24CA" TS24CA 2693,2755.54 r270 top
S3 "TS24CA" TS24CA 2695,2439.54 r270 top
SD1 "5033981892" TF-SMD_503398-1892 349.41,5498.03 r0 top
U1 "CM5" MODULE_CM5108032 13188.98,3108.27 r0 top
U2 "TXB0108PWR" SOP65P640X120-20N 3878.53,755.24 r0 top
U3 "ESDBW5V0A1" X1-DFN1006-2_L1.0-W0.6-P0.65-BI 360.24,2876.97 r0 top
U4 "ES7243E" QFN-20_L3.0-W3.0-P0.40-BL-EP1.7 2729.72,5467.83 r0 top
U5 "GTA2718B-3HA" MIC-SMD_3P-L2.8-W1.9_AP1688 2695.72,5306.91 r0 top
U6 "GTA2718B-3HA" MIC-SMD_3P-L2.8-W1.9_AP1688 2599.72,5301.91 r0 top
U7 "BMS" "MSOP-10_L3.0-W3.0-P0.50-LS4.9-BL - duplicate" 4398.88,2631.57 r270 top
U8 "BQ29209DRBR" "Cell Balancer" 4318.34,1974.91 r0 top
U9 "TPS25750DRJKR" IC_TPS25750DRJKR 2587,252.29 r90 top
U10 "BL24C256A-SFRC" TSSOP-8_L4.4-W3.0-P0.65-LS6.4-BL 2951.24,218.39 r270 top
W1 "Solder Jumper" "SOLDER BRIDGE" 12276,897 r90 top
W2 "Solder Jumper" "SOLDER BRIDGE" 12379,902 r90 top
W3 "Solder Jumper" "SOLDER BRIDGE" 12497,923 r270 top
W4 "Solder Jumper" "SOLDER BRIDGE" 12267,646 r90 top
W5 "Solder Jumper" "SOLDER BRIDGE" 12377,636 r90 top
W6 "Solder Jumper" "SOLDER BRIDGE" 12497.05,652.56 r90 top
Y1 "ASEK-32.768KHZ-L-R-T" ASEK32768KHZLRT 1893,2975 r0 top

## Footprints (in the part's own frame and the unit in brackets; to place one, negate y for a bottom-side part, rotate by r counter-clockwise, add the part's x,y. Pads: shape width x height; smd on the part's side, far side on the other; paste and mask are expansions set on the pad)
"3034TR RPI" [mm]
  rect 1.77x5.08 smd mask+0: 1(-11.485,0) 1(11.485,0)
  round 17.8 smd paste-17.8 mask+0: 2(0,0)
  silkscreen extent -10.78,-9 12.88,7.54, body extent -11.62,-8.73 11.62,7.74, height 4.32
21992303 [mm]
  rect 0.3x1.55 smd: 1(-9.25,5.275) 2(-9,-2.275) 3(-8.75,5.275) 4(-8.5,-2.275) 5(-8.25,5.275) 6(-8,-2.275) 7(-7.75,5.275) 8(-7.5,-2.275) 9(-7.25,5.275) 10(-7,-2.275) 11(-6.75,5.275) 20(-4.5,-2.275) 21(-4.25,5.275) 22(-4,-2.275) 23(-3.75,5.275) 24(-3.5,-2.275) 25(-3.25,5.275) 26(-3,-2.275) 27(-2.75,5.275) 28(-2.5,-2.275) 29(-2.25,5.275) 30(-2,-2.275) 31(-1.75,5.275) 32(-1.5,-2.275) 33(-1.25,5.275) 34(-1,-2.275) 35(-0.75,5.275) 36(-0.5,-2.275) 37(-0.25,5.275) 38(0,-2.275) 39(0.25,5.275) 40(0.5,-2.275) 41(0.75,5.275) 42(1,-2.275) 43(1.25,5.275) 44(1.5,-2.275) 45(1.75,5.275) 46(2,-2.275) 47(2.25,5.275) 48(2.5,-2.275) 49(2.75,5.275) 50(3,-2.275) 51(3.25,5.275) 52(3.5,-2.275) 53(3.75,5.275) 54(4,-2.275) 55(4.25,5.275) 56(4.5,-2.275) 57(4.75,5.275) 58(5,-2.275) 59(5.25,5.275) 60(5.5,-2.275) 61(5.75,5.275) 62(6,-2.275) 63(6.25,5.275) 64(6.5,-2.275) 65(6.75,5.275) 66(7,-2.275) 67(7.25,5.275) 68(7.5,-2.275) 69(7.75,5.275) 70(8,-2.275) 71(8.25,5.275) 72(8.5,-2.275) 73(8.75,5.275) 74(9,-2.275) 75(9.25,5.275)
  rect 1.2x2.75 smd: 76(-10.35,4.5) 77(10.35,4.5)
  round 0.575 hole 1.15 unplated: 78(-10,0)
  round 0.825 hole 1.65 unplated: 79(10,0)
  silkscreen extent -10.95,-2.37 10.95,6.35, body extent -10.95,-2.82 10.95,5.88, height 4.08
ASEK32768KHZLRT [mm]
  rect 1.4x1 smd: 1(-1.1,-0.8) 2(1.1,-0.8) 3(1.1,0.8) 4(-1.1,0.8)
  silkscreen extent -1.15,-1.8 -1.05,-1.7, body extent -1.7,-1.25 1.7,1.25, height 1.3
AUDIO-TH_HYC23-HDMID19-650 [mm]
  rect 0.23x0.85 smd paste-100 mask+0.051: 1(1.8,2.387) 3(1.4,2.387) 5(1,2.387) 7(0.6,2.387) 9(0.2,2.387) 11(-0.2,2.387) 13(-0.6,2.387) 15(-1,2.387) 17(-1.4,2.387) 19(-1.8,2.387)
  rect 0.23x1 smd paste-100 mask+0.051: 2(1.6,1.163) 4(1.2,1.163) 6(0.8,1.163) 8(0.4,1.163) 10(0,1.163) 12(-0.4,1.163) 14(-0.8,1.163) 16(-1.2,1.163) 18(-1.6,1.162)
  oval 1.2x2.2 hole 0.6 slot 1.6 at 90 deg: 20(-3.1,0.983) 20(3.1,1)
  oval 1.2x2.4 hole 0.6 slot 1.8 at 90 deg: 20(-3.1,-2.387) 20(3.1,-2.387)
  silkscreen extent -3.1,-4.79 3.1,2.71
B3BXHALFSN [mm]
  round 1.4 hole 0.9: 1(0,0) 2(2.5,0) 3(5,0)
  silkscreen extent -3.2,-2.35 7.45,3.4, body extent -2.45,-2.35 7.45,3.4, height 7.09
CAPC1206(3216)100_N [mm] "Chip Capacitor, Body 3.2x1.6mm, Height 1mm, IPC Medium Density"
  rect 1.15x1.8 smd: 1(-1.5,0) 2(1.5,0)
  silkscreen extent -0.55,-0.8 0.55,0.8, body extent -1.7,-0.9 1.7,0.9, height 1
CAPC1206(3216)190_N [mm] "Chip Capacitor, Body 3.2x1.6mm, Height 1.9mm, IPC Medium Density"
  rect 1.15x1.8 smd: 1(-1.5,0) 2(1.5,0)
  silkscreen extent -0.55,-0.8 0.55,0.8, body extent -1.7,-0.9 1.7,0.9, height 1.9
CAPC2013X94X50LL20T25 [mm] "Chip Capacitor, 2-Leads, Body 2.01x1.25mm, IPC High Density"
  rect 1.15x1.35 smd: 1(-0.725,0) 2(0.725,0)
  body extent -1.1,-0.72 1.1,0.72, height 0.94
CAPC2013X145X50ML20T25 [mm] "Chip Capacitor, 2-Leads, Body 2.00x1.25mm, IPC Low Density"
  rect 1.5x1.55 smd: 1(-0.9,0) 2(0.9,0)
  body extent -1.1,-0.72 1.1,0.72, height 1.45
"Cell Balancer" [mm]
  rrect25% 0.6x0.3 smd mask+0: 1(-1.4,0.975) 2(-1.4,0.325) 3(-1.4,-0.325) 4(-1.4,-0.975) 5(1.4,-0.975) 6(1.4,-0.325) 7(1.4,0.325) 8(1.4,0.975)
  rect 1.65x2.4 smd paste-2 mask+0.07: 9(0,0)
  round 0.3 hole 0.2 mask+0: 10(0,0.95) 11(-0.575,0) 12(0.575,0) 13(0,-0.95)
  silkscreen extent -2.4,-1.5 1.5,1.5, body extent -1.5,-1.5 1.5,1.5, height 1
ComputeModule5-CM5 [mm]
  rect 0.7x0.2 smd mask+0: 1(-2.04,31.3) 2(1.04,31.3) 3(-2.04,30.9) 4(1.04,30.9) 5(-2.04,30.5) 6(1.04,30.5) 7(-2.04,30.1) 8(1.04,30.1) 9(-2.04,29.7) 10(1.04,29.7) 11(-2.04,29.3) 12(1.04,29.3) 13(-2.04,28.9) 14(1.04,28.9) 15(-2.04,28.5) 16(1.04,28.5) 17(-2.04,28.1) 18(1.04,28.1) 19(-2.04,27.7) 20(1.04,27.7) 21(-2.04,27.3) 22(1.04,27.3) 23(-2.04,26.9) 24(1.04,26.9) 25(-2.04,26.5) 26(1.04,26.5) 27(-2.04,26.1) 28(1.04,26.1) 29(-2.04,25.7) 30(1.04,25.7) 31(-2.04,25.3) 32(1.04,25.3) 33(-2.04,24.9) 34(1.04,24.9) 35(-2.04,24.5) 36(1.04,24.5) 37(-2.04,24.1) 38(1.04,24.1) 39(-2.04,23.7) 40(1.04,23.7) 41(-2.04,23.3) 42(1.04,23.3) 43(-2.04,22.9) 44(1.04,22.9) 45(-2.04,22.5) 46(1.04,22.5) 47(-2.04,22.1) 48(1.04,22.1) 49(-2.04,21.7) 50(1.04,21.7) 51(-2.04,21.3) 52(1.04,21.3) 53(-2.04,20.9) 54(1.04,20.9) 55(-2.04,20.5) 56(1.04,20.5) 57(-2.04,20.1) 58(1.04,20.1) 59(-2.04,19.7) 60(1.04,19.7) 61(-2.04,19.3) 62(1.04,19.3) 63(-2.04,18.9) 64(1.04,18.9) 65(-2.04,18.5) 66(1.04,18.5) 67(-2.04,18.1) 68(1.04,18.1) 69(-2.04,17.7) 70(1.04,17.7) 71(-2.04,17.3) 72(1.04,17.3) 73(-2.04,16.9) 74(1.04,16.9) 75(-2.04,16.5) 76(1.04,16.5) 77(-2.04,16.1) 78(1.04,16.1) 79(-2.04,15.7) 80(1.04,15.7) 81(-2.04,15.3) 82(1.04,15.3) 83(-2.04,14.9) 84(1.04,14.9) 85(-2.04,14.5) 86(1.04,14.5) 87(-2.04,14.1) 88(1.04,14.1) 89(-2.04,13.7) 90(1.04,13.7) 91(-2.04,13.3) 92(1.04,13.3) 93(-2.04,12.9) 94(1.04,12.9) 95(-2.04,12.5) 96(1.04,12.5) 97(-2.04,12.1) 98(1.04,12.1) 99(-2.04,11.7) 100(1.04,11.7) 101(31.96,31.3) 102(35.04,31.3) 103(31.96,30.9) 104(35.04,30.9) 105(31.96,30.5) 106(35.04,30.5) 107(31.96,30.1) 108(35.04,30.1) 109(31.96,29.7) 110(35.04,29.7) 111(31.96,29.3) 112(35.04,29.3) 113(31.96,28.9) 114(35.04,28.9) 115(31.96,28.5) 116(35.04,28.5) 117(31.96,28.1) 118(35.04,28.1) 119(31.96,27.7) 120(35.04,27.7) 121(31.96,27.3) 122(35.04,27.3) 123(31.96,26.9) 124(35.04,26.9) 125(31.96,26.5) 126(35.04,26.5) 127(31.96,26.1) 128(35.04,26.1) 129(31.96,25.7) 130(35.04,25.7) 131(31.96,25.3) 132(35.04,25.3) 133(31.96,24.9) 134(35.04,24.9) 135(31.96,24.5) 136(35.04,24.5) 137(31.96,24.1) 138(35.04,24.1) 139(31.96,23.7) 140(35.04,23.7) 141(31.96,23.3) 142(35.04,23.3) 143(31.96,22.9) 144(35.04,22.9) 145(31.96,22.5) 146(35.04,22.5) 147(31.96,22.1) 148(35.04,22.1) 149(31.96,21.7) 150(35.04,21.7) 151(31.96,21.3) 152(35.04,21.3) 153(31.96,20.9) 154(35.04,20.9) 155(31.96,20.5) 156(35.04,20.5) 157(31.96,20.1) 158(35.04,20.1) 159(31.96,19.7) 160(35.04,19.7) 161(31.96,19.3) 162(35.04,19.3) 163(31.96,18.9) 164(35.04,18.9) 165(31.96,18.5) 166(35.04,18.5) 167(31.96,18.1) 168(35.04,18.1) 169(31.96,17.7) 170(35.04,17.7) 171(31.96,17.3) 172(35.04,17.3) 173(31.96,16.9) 174(35.04,16.9) 175(31.96,16.5) 176(35.04,16.5) 177(31.96,16.1) 178(35.04,16.1) 179(31.96,15.7) 180(35.04,15.7) 181(31.96,15.3) 182(35.04,15.3) 183(31.96,14.9) 184(35.04,14.9) 185(31.96,14.5) 186(35.04,14.5) 187(31.96,14.1) 188(35.04,14.1) 189(31.96,13.7) 190(35.04,13.7) 191(31.96,13.3) 192(35.04,13.3) 193(31.96,12.9) 194(35.04,12.9) 195(31.96,12.5) 196(35.04,12.5) 197(31.96,12.1) 198(35.04,12.1) 199(31.96,11.7) 200(35.04,11.7)
  round 2.7 hole 2.7 paste-2539.97 mask+1.7: Un1(0,48) Un2(0,0) Un3(33,48) Un4(33,0)
  silkscreen extent -3.5,-3.5 36.5,51.5, body extent -2.18,10.21 35.2,32.81, height 1.41
"Correct AMPHENOL_10164227-1001A1RLF" [mm]
  rect 0.2x1.14 smd paste-2 mask+0: 1(9.8,-1.32) 2(9.8,1.32) 3(9.4,-1.32) 4(9.4,1.32) 5(9,-1.32) 6(9,1.32) 7(8.6,-1.32) 8(8.6,1.32) 9(8.2,-1.32) 10(8.2,1.32) 11(7.8,-1.32) 12(7.8,1.32) 13(7.4,-1.32) 14(7.4,1.32) 15(7,-1.32) 16(7,1.32) 17(6.6,-1.32) 18(6.6,1.32) 19(6.2,-1.32) 20(6.2,1.32) 21(5.8,-1.32) 22(5.8,1.32) 23(5.4,-1.32) 24(5.4,1.32) 25(5,-1.32) 26(5,1.32) 27(4.6,-1.32) 28(4.6,1.32) 29(4.2,-1.32) 30(4.2,1.32) 31(3.8,-1.32) 32(3.8,1.32) 33(3.4,-1.32) 34(3.4,1.32) 35(3,-1.32) 36(3,1.32) 37(2.6,-1.32) 38(2.6,1.32) 39(2.2,-1.32) 40(2.2,1.32) 41(1.8,-1.32) 42(1.8,1.32) 43(1.4,-1.32) 44(1.4,1.32) 45(1,-1.32) 46(1,1.32) 47(0.6,-1.32) 48(0.6,1.32) 49(0.2,-1.32) 50(0.2,1.32) 51(-0.2,-1.32) 52(-0.2,1.32) 53(-0.6,-1.32) 54(-0.6,1.32) 55(-1,-1.32) 56(-1,1.32) 57(-1.4,-1.32) 58(-1.4,1.32) 59(-1.8,-1.32) 60(-1.8,1.32) 61(-2.2,-1.32) 62(-2.2,1.32) 63(-2.6,-1.32) 64(-2.6,1.32) 65(-3,-1.32) 66(-3,1.32) 67(-3.4,-1.32) 68(-3.4,1.32) 69(-3.8,-1.32) 70(-3.8,1.32) 71(-4.2,-1.32) 72(-4.2,1.32) 73(-4.6,-1.32) 74(-4.6,1.32) 75(-5,-1.32) 76(-5,1.32) 77(-5.4,-1.32) 78(-5.4,1.32) 79(-5.8,-1.32) 80(-5.8,1.32) 81(-6.2,-1.32) 82(-6.2,1.32) 83(-6.6,-1.32) 84(-6.6,1.32) 85(-7,-1.32) 86(-7,1.32) 87(-7.4,-1.32) 88(-7.4,1.32) 89(-7.8,-1.32) 90(-7.8,1.32) 91(-8.2,-1.32) 92(-8.2,1.32) 93(-8.6,-1.32) 94(-8.6,1.32) 95(-9,-1.32) 96(-9,1.32) 97(-9.4,-1.32) 98(-9.4,1.32) 99(-9.8,-1.32) 100(-9.8,1.32)
  silkscreen extent -11.3,-2.6 11.3,1.5, body extent -11.3,-1.69 11.3,1.69, height 1.41
DFN2510-10_L2.5-W1.0-P0.50-BL [mm]
  rect 0.2x0.665 smd paste-100 mask+0.051: 1(-1,-0.433) 2(-0.5,-0.433) 4(0.5,-0.433) 5(1,-0.433) 6(1,0.433) 7(0.5,0.433) 9(-0.5,0.433) 10(-1,0.433)
  rect 0.4x0.665 smd paste-100 mask+0.051: 3(0,-0.433) 8(0,0.433)
  silkscreen extent -1.33,-1.11 1.33,0.58
DIOM5026X262N [mm]
  rect 2.2x1.55 smd: 1(-2.05,0) 2(2.05,0)
  silkscreen extent -2.83,-1.31 2.52,1.31, body extent -2.52,-1.31 2.52,1.31, height 2.62
DQA(R-PUSON-N10) [mm]
  rect 0.3x0.55 smd: 1(-1,-0.385) 2(-0.5,-0.385) 4(0.5,-0.385) 5(1,-0.385) 6(1,0.385) 7(0.5,0.385) 9(-0.5,0.385) 10(-1,0.385)
  rect 0.4x0.55 smd: 3(0,-0.385) 8(0,0.385)
  silkscreen extent -1.03,-0.86 -0.99,-0.82, body extent -1.25,-0.5 1.25,0.5, height 0.55
ESDA25P351U1M [mm]
  rect 0.55x0.8 smd: 1(0.625,0) 2(-0.625,0)
  silkscreen extent 1.4,-0.05 1.5,0.05, body extent -0.8,-0.5 0.8,0.5, height 0.57
FP-5015-MFG [mm]
  rect 3.43x1.78 smd paste+0 mask+0: 1(0,0)
  silkscreen extent -2.16,-1.34 2.17,1.34
FP-AC0603-MFG [mm]
  rect 0.9x0.8 smd paste+0 mask+0: 1(-0.85,0) 2(0.85,0)
  silkscreen extent -0.85,-0.82 0.85,0.82, body extent -1.4,-0.55 1.4,0.55, height 0.25
FP-AF0402-IPC_B [mil]
  rect 24.23x22.54 smd paste+0 mask+0: 1(-16.87,0) 2(16.87,0)
  silkscreen extent -29,-27 29,27, body extent -35,-17 35,17, height 10
FP-C04-17458-MFG [mm]
  rect 1.1x0.65 smd paste+0 mask+0: 1(-1.15,0.95) 2(-1.15,-0.95) 3(1.15,0)
  silkscreen extent -0.7,-1.52 0.7,1.52, body extent -1.8,-1.62 1.8,1.62, height 0.25
FP-C0402-BB-MFG [mm]
  rect 0.52x0.52 smd paste+0 mask+0: 1(-0.4,0) 2(0.4,0)
  silkscreen extent -0.5,-0.64 0.5,0.64, body extent -0.8,-0.4 0.8,0.4, height 0.25
FP-CC0603-DC-MFG [mm]
  rect 0.9x0.9 smd paste+0 mask+0: 1(-0.7,0) 2(0.7,0)
  silkscreen extent -0.9,-0.82 0.9,0.82, body extent -1.35,-0.75 1.35,0.75, height 0.25
FP-CC1210-GD-IPC_A [mil]
  rect 67.04x114.34 smd paste+0 mask+0: 1(-59.06,0) 2(59.06,0)
  silkscreen extent -14,-57 14,57, body extent -112,-77 112,77, height 10
FP-HCJ0805-MFG [mm]
  rect 1.4x1.44 smd paste+0 mask+0: 1(-1.1,0) 2(1.1,0)
  silkscreen extent -0.03,-0.72 0.03,0.72, body extent -1.9,-0.82 1.9,0.82, height 0.25
FP-HCJ1206-MFG [mm]
  rect 1.8x1.84 smd paste+0 mask+0: 1(-1.5,0) 2(1.5,0)
  silkscreen extent -0.23,-0.92 0.23,0.92, body extent -2.5,-1.02 2.5,1.02, height 0.25
FP-HZ0805B272R-10-MFG [mm]
  rect 1.285x1.47 smd paste+0 mask+0: 1(-0.972,0) 2(0.972,0)
  silkscreen extent -1.11,-1.18 1.1,1.2, body extent -1.72,-0.83 1.72,0.83, height 0.25
FP-NCP21-0_2-IPC_A [mil]
  rect 57.27x61.27 smd paste+0 mask+0: 1(-36.45,0) 2(36.45,0)
  silkscreen extent -65,-46 65,46, body extent -85,-50 85,50, height 10
FP-RMCF0402-MFG [mm]
  rect 0.5x0.6 smd paste+0 mask+0: 1(-0.5,0) 2(0.5,0)
  silkscreen extent -0.55,-0.7 0.55,0.7, body extent -0.85,-0.4 0.85,0.4, height 0.25
FP-RMCF0603-IPC_A [mil]
  rect 47.48x41.66 smd paste+0 mask+0: 1(-31.54,0) 2(31.54,0)
  silkscreen extent -55,-37 55,37, body extent -75,-41 75,41, height 10
FP-RMCF0603-IPC_C [mil]
  rect 31.73x33.79 smd paste+0 mask+0: 1(-23.66,0) 2(23.66,0)
  silkscreen extent -40,-34 40,34, body extent -43,-23 43,23, height 10
FP-RMCF0603-MFG [mm]
  rect 0.65x0.9 smd paste+0 mask+0: 1(-0.725,0) 2(0.725,0)
  silkscreen extent -0.85,-0.88 0.85,0.88, body extent -1.15,-0.58 1.15,0.58, height 0.25
FP-RMCF1206-IPC_B [mil]
  rect 55.27x69.22 smd paste+0 mask+0: 1(-54.16,0) 2(54.16,0)
  silkscreen extent -15,-35 15,35, body extent -92,-44 92,44, height 10
FP-RMCF1210-MFG [mm]
  rect 1x2.8 smd paste+0 mask+0: 1(-1.6,0) 2(1.6,0)
  silkscreen extent -0.72,-1.38 0.72,1.38, body extent -2.2,-1.5 2.2,1.5, height 0.25
FP-RN73R2A-IPC_C [mil]
  rect 33.67x53.39 smd paste+0 mask+0: 1(-32.5,0) 2(32.5,0)
  silkscreen extent -49,-44 49,44, body extent -53,-32 53,32, height 10
FP-SOT23-IPC_A [mm]
  rect 1.659x0.627 smd paste+0 mask+0: 1(-0.977,0.915)
  rrect100% 1.659x0.627 smd paste+0 mask+0: 2(-0.977,-0.915) 3(0.977,0)
  silkscreen extent 0.23,-1.45 0.65,1.45, body extent -2.31,-1.95 2.31,1.95, height 0.25
FP-SOT23-MFG [mm]
  rect 0.9x0.8 smd paste+0 mask+0: 1(-1,0.95) 2(-1,-0.95) 3(1,0)
  silkscreen extent -0.7,-1.5 0.7,1.5, body extent -1.55,-1.6 1.55,1.6, height 0.25
FP-TSW-101-07-L-S-MFG [mm]
  rect 1.57x1.57 hole 1.02 paste-2539.97 mask+0: 1(0,0)
  silkscreen extent -1.46,-1.34 1.46,1.34, body extent -1.56,-1.44 1.56,1.44, height 0.25
FP-TSW-102-07-F-S-MFG [mm]
  rect 1.57x1.57 hole 1.02 paste-2539.97 mask+0: 1(-1.27,0)
  round 1.57 hole 1.02 paste-2539.97 mask+0: 2(1.27,0)
  silkscreen extent -3.3,-1.34 2.73,1.34, body extent -2.83,-1.44 2.83,1.44, height 0.25
FP-TSW-102-12-T-S-MFG [mm]
  rect 1.57x1.57 hole 1.02 paste-2539.97 mask+0: 1(-1.27,0)
  round 1.57 hole 1.02 paste-2539.97 mask+0: 2(1.27,0)
  silkscreen extent -3.4,-1.34 2.61,1.34, body extent -2.71,-1.44 2.71,1.44, height 0.25
FP-TSW-102-14-G-S-MFG [mm]
  rect 1.57x1.57 hole 1.02 paste-2539.97 mask+0: 1(-1.27,0)
  round 1.57 hole 1.02 paste-2539.97 mask+0: 2(1.27,0)
  silkscreen extent -2.73,-1.95 2.73,1.34, body extent -2.83,-1.44 2.83,1.44, height 0.25
FP-TSW-103-14-G-S-MFG [mm]
  rect 1.57x1.57 hole 1.02 paste-2539.97 mask+0: 1(-2.54,0)
  round 1.57 hole 1.02 paste-2539.97 mask+0: 2(0,0) 3(2.54,0)
  silkscreen extent -4,-1.95 4,1.34, body extent -4.1,-1.44 4.1,1.44, height 0.25
FPC-SMD_15P-P0.50_HC-FPC-1.0-15P-FHH20 [mm]
  rect 0.5x1.5 smd paste+0 mask+0.05: 1(7,1.55) 2(6,1.55) 3(5,1.55) 4(4,1.55) 5(3,1.55) 6(2,1.55) 7(1,1.55) 8(0,1.55) 9(-1,1.55) 10(-2,1.55) 11(-3,1.55) 12(-4,1.55) 13(-5,1.55) 14(-6,1.55) 15(-7,1.55)
  rect 1.5x2.5 smd paste+0 mask+0.05: 16(-9.2,-1.55) 17(9.2,-1.55)
  silkscreen extent -9.52,-3.4 9.52,1.9
FPC-SMD_P0.5-22P_FGS-XJ-H2.0 [mm]
  rect 0.3x1.3 smd paste+0 mask+0.051: 1(-5.252,-1.338) 2(-4.752,-1.338) 3(-4.252,-1.338) 4(-3.752,-1.338) 5(-3.252,-1.338) 6(-2.752,-1.338) 7(-2.252,-1.338) 8(-1.752,-1.338) 9(-1.25,-1.339) 10(-0.752,-1.338) 11(-0.252,-1.338) 12(0.248,-1.338) 13(0.748,-1.338) 14(1.248,-1.338) 15(1.748,-1.338) 16(2.248,-1.338) 17(2.748,-1.338) 18(3.248,-1.338) 19(3.748,-1.338) 20(4.25,-1.339) 21(4.748,-1.338) 22(5.248,-1.338)
  rect 2x1.6 smd paste+0 mask+0.051: 23(6.95,1.339) 24(-6.95,1.339)
  silkscreen extent -7.7,-1.34 7.7,4.76
IC_TPS25750DRJKR [mm]
  rrect40% 0.6x0.2 smd mask+0: 1(-2.9,1) 2(-2.9,0.6) 3(-2.9,0.2) 4(-2.9,-0.2) 5(-2.9,-0.6) 6(-2.9,-1)
  rrect40% 0.2x0.6 smd mask+0: 7(-2.4,-1.9) 8(-2,-1.9) 9(-1.6,-1.9) 10(-1.2,-1.9) 11(-0.8,-1.9) 12(-0.4,-1.9) 13(0,-1.9) 14(0.4,-1.9) 15(0.8,-1.9) 16(1.2,-1.9) 17(1.6,-1.9) 18(2,-1.9) 19(2.4,-1.9) 26(2.4,1.9) 27(2,1.9) 28(1.6,1.9) 29(1.2,1.9) 30(0.8,1.9) 31(0.4,1.9) 36(-1.6,1.9) 37(-2,1.9) 38(-2.4,1.9)
  rrect25% 0.7x1.253 smd paste-2 mask+0: 20_22(2.9,-0.677) 23_25(2.9,0.677)
  rrect25% 0.7x0.7 smd paste-1 mask+0: 32_33(-0.2,1.9) 34_35(-1,1.9)
  rrect5% 2.72x2.65 smd paste-2: 39(-0.965,0)
  rrect5% 1.53x2.65 smd paste-2: 40(1.56,0)
  round 0.4 hole 0.2 mask+0: 41(-0.965,1.075) 42(-2.075,0) 43(-0.965,0) 44(0.145,0) 45(-0.965,-1.075) 46(1.56,1.075) 47(1.56,0) 48(1.56,-1.075)
  silkscreen extent -3.85,-2 3,2, body extent -3,-2 3,2, height 0.8
IND-SMD_L2.0-W1.6_MTQH201610S [mm]
  rect 0.8x1.7 smd paste+0 mask+0.051: 1(-0.65,0) 2(0.65,0)
  silkscreen extent -1.1,-1.1 1.1,1.1
IND-SMD_L2.5-W2.0 [mm]
  rect 1.2x2.2 smd: 1(1.028,0) 2(-1.028,0)
  silkscreen extent -0.2,-1.02 0.2,1.02
IND-SMD_L7.0-W6.6 [mm]
  rect 2.4x3.2 smd: 1(-3,0) 2(3,0)
  silkscreen extent -3.5,-3.3 3.5,3.3
IND-SMD_L11.5-W10.0_FXL1040 [mm]
  rect 3x3.5 smd: 1(-5,0) 2(5,0)
  silkscreen extent -5.75,-5 5.75,5
JST_SHBM04B-SRSS-TB [mm]
  rrect25% 0.6x1.55 smd mask+0: 1(-1.5,-1.325) 2(-0.5,-1.325) 3(0.5,-1.325) 4(1.5,-1.325)
  rrect21% 1.2x1.8 smd mask+0: MP(-2.8,1.2) MP(2.8,1.2)
  silkscreen extent -3.11,-2.1 3.11,2.01, body extent -3.5,-2.4 3.5,2, height 0.25
KT0805G [mm]
  rect 1.4x1 smd: 1(0,-0.95) 2(0,0.95)
  silkscreen extent -0.05,-2 0.05,-1.9
LEDC1608X70N [mm]
  rect 0.9x0.95 smd: 1(-0.75,0) 2(0.75,0)
  silkscreen extent -1.55,-0.82 0.75,0.82